# Altium PCB PCB1.PcbDoc
Units mil, origin at the board's own origin, x right, y up, seen from the top; angles counter-clockwise.
Board outline 3435 x 1880 mil, 2 copper layers (Top Layer, Bottom Layer); 58 components, 42 nets, 176 pads, 52 vias.
Unrouted connection lines stored in the file: 1.
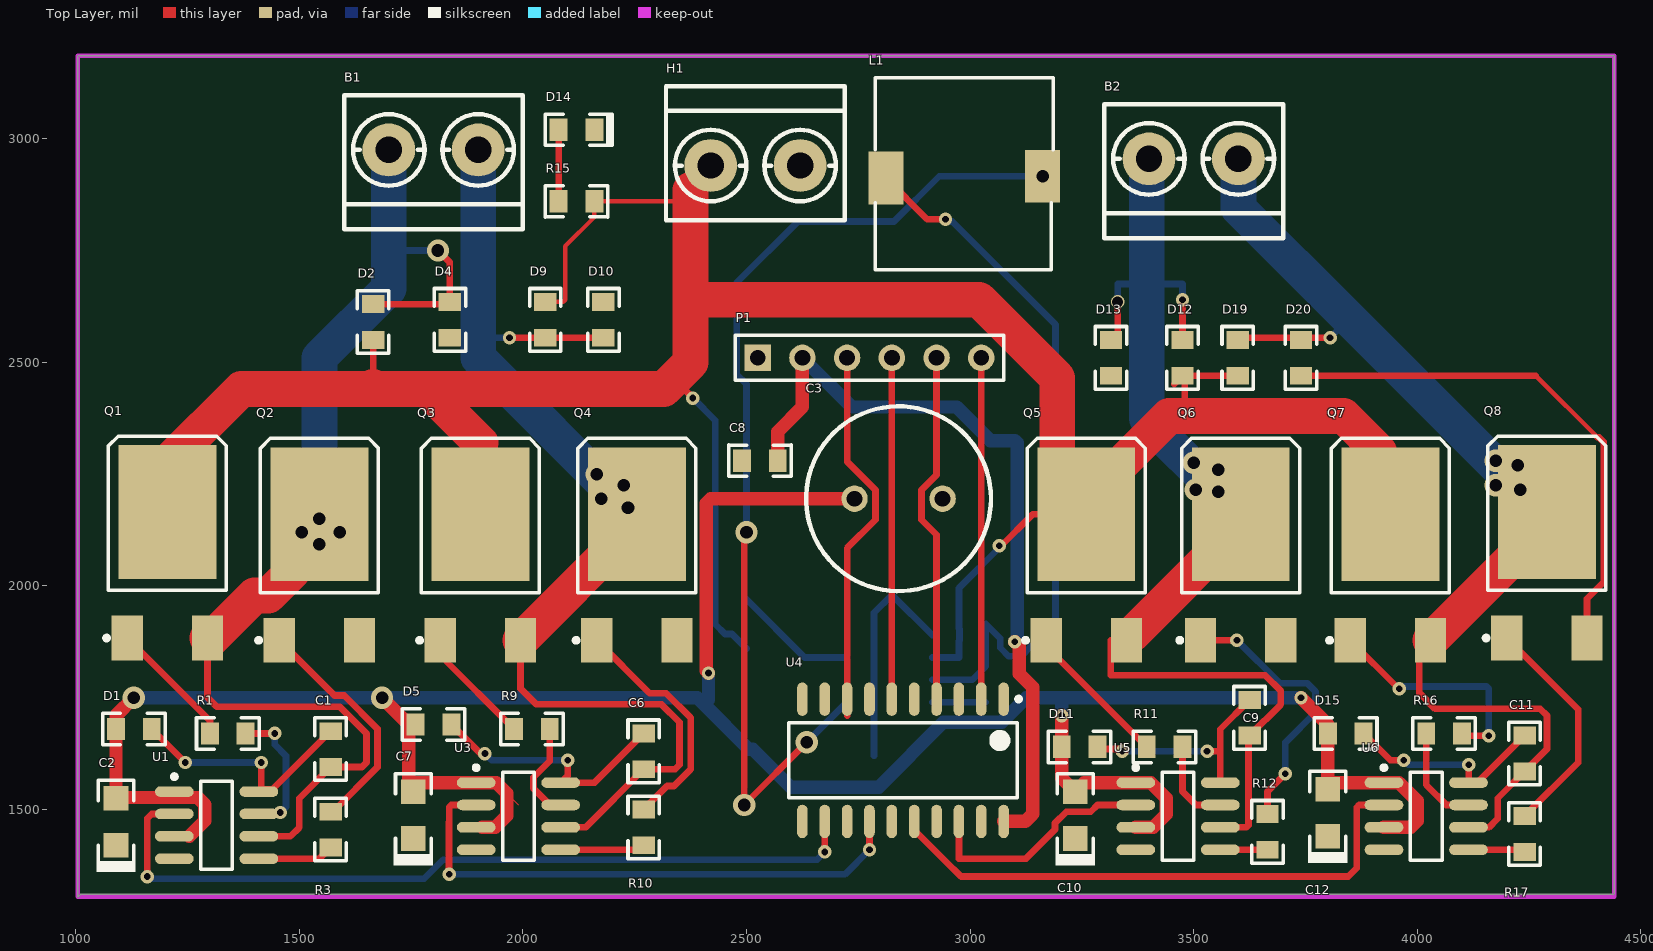
[diagram p0: Top Layer view]
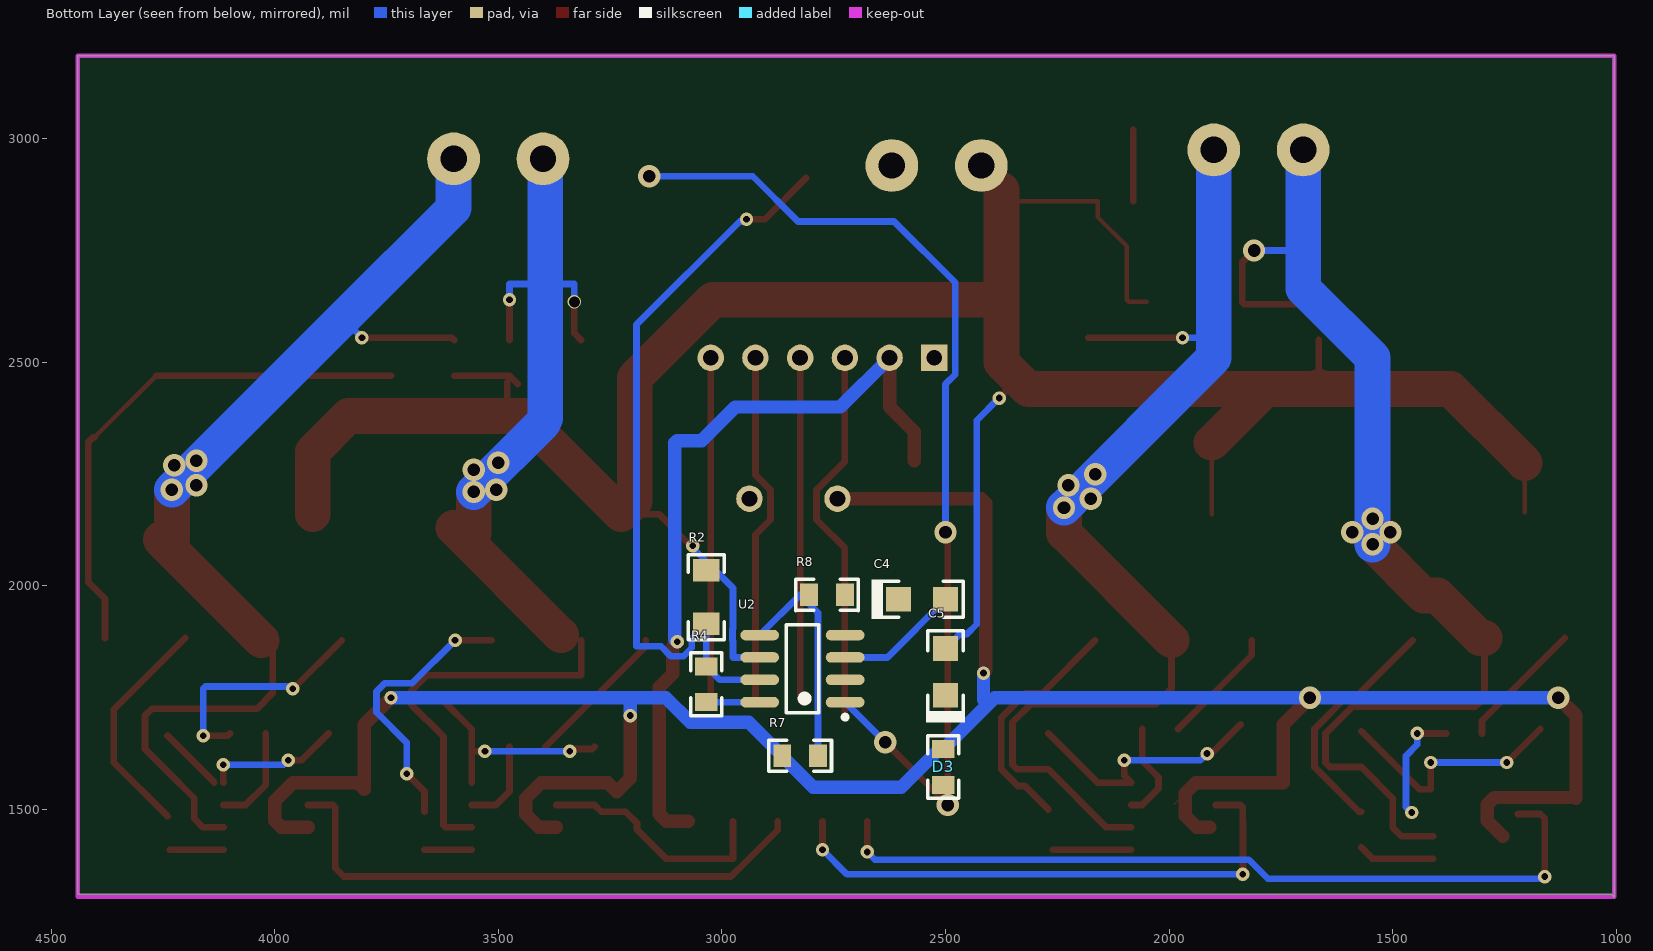
[diagram p1: Bottom Layer view, seen from below]

## Layer stack, top to bottom
Top Layer: signal copper 1.4
Dielectric: dielectric 12.6, FR-4, Dk 4.8
Bottom Layer: signal copper 1.4

## Board outline
1005,3185 1005,1305 1010,1310 4440,1310 4440,3185

## Design rules (kind name [scope] priority, off if disabled: settings)
Clearance [All] p1: gap=10
PolygonConnect [All] p1: connectstyle=Relief reliefconductorwidth=10 reliefentries=4 polygonreliefangle="90 Angle" airgapwidth=10
RoutingVias [All] p1: holewidth=28 width=50 viastyle="Through Hole" minholewidth=28 minwidth=50 maxholewidth=28 maxwidth=50
SolderMaskExpansion [All] p1: expansion=4
Width [All] p1: maxlimit=100 minlimit=1 preferedwidth=10 minimp=50.000000 maximp=50.000000 favimp=50.000000
28 further rules are at their usual default settings.

## Classes and differential pairs
component class Sheet1: C4 C5 D3 R2 R4 R7 R8 U2

## Components (designator, comment, footprint, x,y, rotation, side; value= is the part's Value field where it differs from the comment)
B1 "Motor" KF301-2P 1800,2975 r270 top
B2 "Motor" KF301-2P 3500,2955 r270 top
C1 "Cap" 0805(2012) 1570,1635 r270 top
C2 "Cap Pol1" SOD-323(0805) 1090,1470 r270 top
C3 "Cap Pol1" RB5-10.5 2840,2195 r0 top
C4 "Cap Pol1" SOD-323(0805) 2555,1970 r0 bottom
C5 "Cap Pol1" SOD-323(0805) 2500,1805 r270 bottom
C6 "Cap" 0805(2012) 2270,1630 r270 top
C7 "Cap Pol1" SOD-323(0805) 1755,1485 r270 top
C8 "Cap" 0805(2012) 2530,2280 r0 top
C9 "Cap" 0805(2012) 3625,1705 r270 top
C10 "Cap Pol1" SOD-323(0805) 3235,1485 r270 top
C11 "Cap" 0805(2012) 4240,1625 r270 top
C12 "Cap Pol1" SOD-323(0805) 3800,1490 r270 top
D1 "1N5819" 0805(2012) 1130,1680 r180 top
D2 "1N5819" 0805(2012) 1665,2590 r90 top
D3 "1N5819" 0805(2012) 2505,1595 r270 bottom
D4 "1N5819" 0805(2012) 1836.67,2595 r270 top
D5 "1N5819" 0805(2012) 1800,1690 r180 top
D9 "1N5819" 0805(2012) 2050,2595 r270 top
D10 "1N5819" 0805(2012) 2180,2595 r90 top
D11 "1N5819" 0805(2012) 3245,1640 r180 top
D12 "1N5819" 0805(2012) 3475,2510 r90 top
D13 "1N5819" 0805(2012) 3315,2510 r270 top
D14 "RED" 0805LED 2120,3020 r0 top
D15 "1N5819" 0805(2012) 3840,1670 r180 top
D19 "1N5819" 0805(2012) 3598.33,2510 r90 top
D20 "1N5819" 0805(2012) 3740,2510 r270 top
H1 "POWER IN" KF301-2P 2520,2940 r90 top
L1 "Inductor" 电感10*12 2985,2920 r0 top
P1 "PWM" HDR1X6 2525,2510 r0 top
Q1 "IR7843" LR7843 1205,2025 r270 top
Q2 "IR7843" LR7843 1545,2020 r270 top
Q3 "IR7843" LR7843 1905,2020 r270 top
Q4 "IR7843" LR7843 2255,2020 r270 top
Q5 "IR7843" LR7843 3260,2020 r270 top
Q6 "IR7843" LR7843 3605,2020 r270 top
Q7 "IR7843" LR7843 3940,2020 r270 top
Q8 "IR7843" LR7843 4290,2025 r270 top
R1 "Res2" 0805(2012) 1340,1670 r180 top
R2 "Res2" 1206(3216) 3035,1975 r90 bottom
R3 "Res2" 0805(2012) 1570,1455 r90 top
R4 "Res2" 0805(2012) 3035,1780 r90 bottom
R7 "Res2" 0805(2012) 2825,1620 r180 bottom
R8 "Res2" 0805(2012) 2765,1980 r0 bottom
R9 "Res2" 0805(2012) 2020,1680 r180 top
R10 "Res2" 0805(2012) 2270,1460 r90 top
R11 "Res2" 0805(2012) 3435,1640 r180 top
R12 "Res2" 0805(2012) 3665,1450 r90 top
R15 "Res2" 0805(2012) 2120,2860 r180 top
R16 "Res2" 0805(2012) 4060,1670 r0 top
R17 "Res2" 0805(2012) 4240,1445 r90 top
U1 "IR2104S" IR2104S 1315,1465 r0 top
U2 "MC34063" MC34063 2820,1815 r0 bottom
U3 "IR2104S" IR2104S 1990,1485 r0 top
U4 "74LS244" 74ls244DA 2850,1610 r270 top
U5 "IR2104S" IR2104S 3465,1485 r0 top
U6 "IR2104S" IR2104S 4020,1485 r0 top

## Footprints (in the part's own frame and the unit in brackets; to place one, negate y for a bottom-side part, rotate by r counter-clockwise, add the part's x,y. Pads: shape width x height; smd on the part's side, far side on the other; paste and mask are expansions set on the pad)
74ls244DA [mm] "SOP, 20-Leads, Body 12.80x5.50mm, Pitch 1.27mm, IPC Medium Density"
  oval 1.9x0.6 smd: 1(-3.475,5.715) 2(-3.475,4.445) 3(-3.475,3.175) 4(-3.475,1.905) 5(-3.475,0.635) 6(-3.475,-0.635) 7(-3.475,-1.905) 8(-3.475,-3.175) 9(-3.475,-4.445) 10(-3.475,-5.715) 11(3.475,-5.715) 12(3.475,-4.445) 13(3.475,-3.175) 14(3.475,-1.905) 15(3.475,-0.635) 16(3.475,0.635) 17(3.475,1.905) 18(3.475,3.175) 19(3.475,4.445) 20(3.475,5.715)
  silkscreen extent -3.6,-6.5 2.13,6.69, body extent -2.8,-6.5 2.8,6.5, height 2.2
0805(2012) [mil]
  rect 40x50 smd: 1(-40,0) 2(40,0)
  silkscreen extent -70,-35 70,35
0805LED [mil]
  rect 40x50 smd: 1(-40,0) 2(40,0)
  silkscreen extent -70,-35 80,35
1206(3216) [mil]
  rect 50x60 smd: 1(-60,0) 2(60,0)
  silkscreen extent -95,-40 95,40
HDR1X6 [mm] "Connector; Header; 6 Position"
  rect 1.5x1.5 hole 0.9: 1(0,0)
  round 1.5 hole 0.9: 2(2.54,0) 3(5.08,0) 4(7.62,0) 5(10.16,0) 6(12.7,0)
  silkscreen extent -1.27,-1.27 13.97,1.27
IR2104S [mm]
  oval 2.2x0.6 smd: 1(-2.4,1.905) 2(-2.4,0.635) 3(-2.4,-0.635) 4(-2.4,-1.905) 5(2.4,-1.905) 6(2.4,-0.635) 7(2.4,0.635) 8(2.4,1.905)
  silkscreen extent -2.52,-2.5 0.9,2.88, body extent -2,-2.5 2,2.5, height 1.55
KF301-2P [mm]
  round 3 hole 1.5: 1(0,-2.54) 2(0,2.54)
  silkscreen extent -3.1,-5.08 4.5,5.08
LR7843 [mm]
  rect 2.54x1.778 smd: 1(3.6,-2.28) 3(3.6,2.28)
  rect 7.6x5.55 smd: 2(-3.556,0)
  silkscreen extent -7.87,-3.58 3.72,3.35
MC34063 [mm] "SOIC, 8-Leads, Body 4.90x3.90mm, Pitch 1.27mm, IPC Medium Density"
  oval 2.2x0.6 smd: 1(-2.425,1.905) 2(-2.425,0.635) 3(-2.425,-0.635) 4(-2.425,-1.905) 5(2.425,-1.905) 6(2.425,-0.635) 7(2.425,0.635) 8(2.425,1.905)
  silkscreen extent -2.55,-2.5 0.93,2.88, body extent -2,-2.5 2,2.5, height 1.5
RB5-10.5 [mm] "Capacitor (Radial); 2 Leads"
  round 1.5 hole 0.9: 1(-2.5,0) 2(2.5,0)
  silkscreen extent -5.25,-5.25 5.25,5.25
SOD-323(0805) [mil]
  rect 55x55 smd: 1(-55,0) 2(50,0)
  silkscreen extent -95,-44 110,44
电感10*12 [mm]
  rect 2x3 smd: 1(-4.4,-0.2) 2(4.5,-0.1)
  silkscreen extent -5,-5.4 5.1,5.5

## Part data
B1 B2: library part "Motor Servo", "Servo Motor"
C1 C6 C8 C9 C11: "Capacitor"
C2 C3 C4 C5 C7 C10 C12: "Polarized Capacitor (Radial)"
D1 D2 D3 D4 D5 D9 D10 D11 D12 D13 D15 D19 D20: library part 1N4148, "Silicon Epitaxial Planar Diode for Various Detector, Modulator, Demodulator"
D14: library part LED2, "Typical RED, GREEN, YELLOW, AMBER GaAs LED"
P1: library part "Header 6", "Header, 6-Pin"
Q1 Q2 Q3 Q4 Q5 Q6 Q7 Q8: "N-Channel Power MOSFET"
R1 R2 R3 R4 R7 R8 R9 R10 R11 R12 R15 R16 R17: "Resistor"

## Via types
v1: diameter 30, hole 15, Top Layer to Bottom Layer, 28 vias
v2: diameter 50, hole 28, Top Layer to Bottom Layer, 23 vias
v3: diameter 30, hole 25, Top Layer to Bottom Layer, 1 vias

## Nets (pads, with @x,y where several pads share a name; then routed paths per layer and width w, separated by ;. In a path a pad name is that pad's centre, name@x,y a point inside that pad or via, vN(x,y) a via of type N, cw(c..) or ccw(c..) an arc to the next point about the centre after c; other vN are vias at no path point)
5V: C8.2 P1.2 U4.20 | length 1732.1
  Top Layer w30: C8.2 2570,2345 2625,2400 P1.2 ; U4.20 3123.19,1473.19 3140,1490 3140,1773.5 3110.24,1803.27 3110.24,1864.76 v1(3100,1875)
  Bottom Layer w30: P1.2 2735,2400 2970,2400 3045,2325 3100,2325 3105,2320 3105,1880 v1(3100,1875)
12V: C2.1 C3.1 C7.1 C10.1 C12.1 D1.2 D3.1 D5.2 D11.2 D15.2 R7.1 U1.1 U1.3 U3.1 U3.3 U5.1 U5.3 U6.1 U6.3 | length 5840.7
  Top Layer w0: 1963.82,1536.18 1990,1510
  Top Layer w30: v2(1130,1750) 1090,1710 D1.2 C2.1 1091.81,1526.81 1273.19,1526.81 1288.82,1511.18 1288.82,1474.75 U1.3@1254.07,1440 ; v2(1685,1750) 1745,1690 1745,1560 1940,1560 1963.82,1536.18 1963.82,1485.72 1938.1,1460 U3.3@1908.7,1460 ; v1(2415,1805) 2410,1810 2410,2185 2420,2195 C3.1 ; v1(3205,1710) D11.2 3205,1570 C10.1 3255,1560 U5.1 3404.07,1560 3438.82,1525.25 3438.82,1489.25 3409.57,1460 U5.3 ; v1(3740,1750) 3800,1690 D15.2 C12.1 3815,1560 U6.1 3959.07,1560 4000,1519.07 4000,1475 3985,1460 U6.3
  Bottom Layer w30: v2(1130,1750) v2(1685,1750) 2390,1750 2405,1735 ; v1(2415,1805) 2415,1745 2405,1735 ; v1(3205,1710) 3205,1750 ; v1(3740,1750) 3205,1750 ; 2405,1735 D3.1 2514.09,1635 2599.09,1550 2795.36,1550 2940.36,1695 3070.36,1695 3125.36,1750 3205,1750
GND: C2.2 C3.2 C4.2 C5.2 C7.2 C8.1 C10.2 C12.2 D4.2 D10.2 D13.2 D14.2 D20.2 H1.1 P1.1 Q2.3 Q4.3 Q6.3 Q8.3 R8.1 U1.4 U2.2 U2.4 U3.4 U4.1 U4.3 U4.5 U4.7 U4.9 U4.10 U4.11 U4.13 U4.15 U4.17 U4.19 U5.4 U6.4 | length 1192
  Top Layer w10: 4265,2470 4402.89,2332.11
  Top Layer w15: D20.2 4265,2470 ; Q8.3 4379.76,1971.16 4416.75,2008.14 4416.75,2321.86 4406.5,2332.11 4402.89,2332.11
"MOTOR IN1": U4.18 U5.2 | length 537
  Top Layer w15: U4.18 2975,1390 3125,1390 3190,1455 3190,1469.75 3215.25,1495 3269.75,1495 3284.75,1510 U5.2
"MOTOR IN2": U4.16 U6.2 | length 1258.1
  Top Layer w15: U4.16 2875,1454.64 2964.64,1365 2965,1365 2980,1350 3845.63,1350 3864.7,1369.07 3864.7,1472.44 3865,1472.73 3865,1505 3870,1510 U6.2
"MOTOR IN3": U3.2 U4.14 | length 1238.8
  Top Layer w15: v1(1835,1355) 1834.7,1355.3 1834.7,1472.14 1835,1472.44 1835,1505 1840,1510 U3.2 ; v1(2775,1410) U4.14
  Bottom Layer w15: v1(1835,1355) 2720,1355 v1(2775,1410)
"MOTOR IN4": U1.2 U4.12 | length 1807.9
  Top Layer w15: v1(1160,1350) 1159.7,1350.3 1159.7,1452.44 1160,1452.73 1160,1480 1170,1490 U1.2 ; v1(2675,1405) U4.12
  Bottom Layer w15: v1(1160,1350) 1160,1345 1779.04,1345 1821.54,1387.5 2657.5,1387.5 v1(2675,1405)
NetB1_1: B1.1 C1.2 D2.2 D4.1 Q1.3 Q2.2 U1.6 | length 2626.6
  Top Layer w15: Q1.3 1294.76,1750.24 1315,1730 1590,1730 1650,1670 1650,1605 1640,1595 C1.2 1500,1525 1500,1460 1480,1440 U1.6 ; D2.2 1831.67,2630 D4.1 1836.67,2723.33 v2(1810,2750)
  Top Layer w80: Q1.3 1304.53,1883.27 1399.53,1978.27 1430.43,1978.27 v2(1545,2092.83)
  Bottom Layer w15: 1700,2750 v2(1810,2750)
  Bottom Layer w80: v2(1545,2092.83) 1545,2510 1700,2665 1700,2750 B1.1
  other v2: 1505,2120 1590,2120 1545,2150
NetB1_2: B1.2 C6.2 D9.2 D10.1 Q3.3 Q4.2 U3.6 | length 2522.9
  Top Layer w15: v1(1970,2555) D9.2 D10.1 ; Q3.3 1994.76,1770.24 2030,1735 2310,1735 2350,1695 2350,1600 2340,1590 C6.2 2140,1460 U3.6
  Top Layer w80: Q3.3 2235,2118.5 v2(2235,2175)
  Bottom Layer w15: 1900,2555 v1(1970,2555)
  Bottom Layer w80: 1900,2550 1900,2510 v2(2235,2175) ; 1900,2555 B1.2
  other v2: 2175,2195 2225,2225 2165,2250
NetB2_1: B2.1 C9.2 D12.2 D13.1 Q5.3 Q6.2 U5.6 | length 2474.7
  Top Layer w15: Q5.3@3314.76,1878.27 3314.76,1800.24 3659.76,1800.24 3695,1765 3695,1735 C9.2 3622.5,1662.5 3622.5,1464.86 3617.64,1460 U5.6 ; D13.1 3330,2565 v3(3330,2635) ; D12.2 v1(3475,2640)
  Top Layer w80: Q5.3@3360,1890 Q6.2@3600.24,2130.24 ; Q6.2@3555,2118.5 v2(3555,2210)
  Bottom Layer w15: v3(3330,2635) 3330,2675 3395,2675 ; 3430,2675 3475,2675 v1(3475,2640)
  Bottom Layer w80: 3395,2375 3395,2675 B2.1@3395,2965 ; 3400,2365 v2(3555,2210)
  other v2: 3505,2215 3555,2260 3500,2275
NetB2_2: B2.2 C11.2 D19.2 D20.1 Q7.3 Q8.2 U6.6 | length 2473.3
  Top Layer w15: D19.2 3603.33,2555 v1(3805,2555) ; Q7.3@4004.76,1878.27 4004.76,1760.24 4040,1725 4275,1725 4290,1710 4290,1635 C11.2 4180,1525 4180,1480 4160,1460 U6.6
  Top Layer w80: Q7.3 Q8.2@4255,2103.5 ; Q8.2@4230,2103.5 v2(4230,2215)
  Bottom Layer w15: v1(3805,2555) 3847.5,2597.5
  Bottom Layer w80: B2.2 3600,2845 3847.5,2597.5 v2(4230,2215)
  other v2: 4175,2225 4225,2270 4175,2280
NetC1_1: C1.1 D1.1 U1.8 | length 544.2
  Top Layer w15: D1.1 v1(1245,1605) ; v1(1415,1605) 1415,1545.51 1440.51,1545.51 C1.1
  Bottom Layer w15: v1(1245,1605) v1(1415,1605)
NetC4_1: C4.1 U2.3 | length 278.4
  Bottom Layer w15: C4.1 2630,1840 U2.3
NetC6_1: C6.1 D5.1 U3.8 | length 580.6
  Top Layer w15: D5.1 1905,1625 v1(1915,1625) ; v1(2100,1610) 2100,1575.51 U3.8 2160,1560 C6.1
  Bottom Layer w15: v1(1915,1625) 1930,1610 v1(2100,1610)
NetC9_1: C9.1 D11.1 U5.8 | length 500.8
  Top Layer w15: D11.1 3290,1635 3345,1635 v1(3340,1630) ; v1(3530,1630) 3559.49,1630 ; U5.8 3559.49,1630 ; C9.1 3559.49,1679.49 3559.49,1630
  Bottom Layer w15: v1(3340,1630) v1(3530,1630)
NetC11_1: C11.1 D15.1 U6.8 | length 453
  Top Layer w15: D15.1 3940,1610 v1(3970,1610) ; U6.8 4115,1560 v1(4115,1600) ; U6.8@4135,1560 C11.1
  Bottom Layer w15: v1(3970,1610) 3980,1600 v1(4115,1600)
NetD3_2: D3.2 L1.2 U2.1 | length 2321.6
  Top Layer w15: v2(2495,1510) v2@2495,1510.47 ; v2(2500,2120) 2495,2115 v2@2495,1510.47 ; v2(2635,1650.47) v2@2495,1510.47
  Bottom Layer w15: v2(2495,1510) D3.2@2495,1545 ; v2(2500,2120) 2500,2451.2 2477.97,2473.22 2477.97,2677.97 2615,2815 2830,2815 2931.06,2916.06 v2(3162.17,2916.06) ; v2(2635,1650.47) U2.1
NetD14_1: D14.1 R15.2 | length 160
  Top Layer w15: R15.2 D14.1
NetL1_1: L1.1 R2.1 R4.2 U2.7 | length 1668.5
  Top Layer w15: L1.1 2903.9,2820 v1(2945,2820)
  Bottom Layer w15: U2.7 3005,1790 R4.2 R2.1 3067.5,1882.5 3067.5,1861.54 3086.54,1842.5 3113.46,1842.5 3135.96,1865 3190.87,1865 3190.87,2584.13 2960,2815 2950,2815 v1(2945,2820)
NetP1_3: P1.3 U4.8 | length 852.7
  Top Layer w15: U4.8@2725,1710 U4.8 2725,2084.37 2788.6,2147.97 2788.6,2214.48 2725,2278.08 P1.3
NetP1_4: P1.4 U4.6 | length 763.2
  Top Layer w15: U4.6 P1.4
NetP1_5: P1.5 U4.4 | length 791
  Top Layer w15: U4.4 2925,2114.37 2891.4,2147.97 2891.4,2214.48 2925,2248.08 P1.5
NetP1_6: P1.6 U4.2 | length 763.2
  Top Layer w15: U4.2 P1.6
NetQ1_1: Q1.1 R1.2 | length 289.8
  Top Layer w15: Q1.1 1300,1698.5 R1.2
NetQ2_1: Q2.1 R3.2 | length 533.7
  Top Layer w15: Q2.1 1578.5,1755 1600.36,1755 1675,1680.36 1675,1594.64 1575.36,1495 R3.2
NetQ3_1: Q3.1 R9.2 | length 266.5
  Top Layer w15: Q3.1 1815.24,1844.76 R9.2
NetQ4_1: Q4.1 R10.2 | length 539.2
  Top Layer w15: Q4.1 2283.5,1760 2320.36,1760 2375,1705.36 2375,1589.64 2337.86,1552.5 2322.5,1552.5 R10.2
NetQ5_1: Q5.1 R11.2 | length 331.4
  Top Layer w15: Q5.1 3170.24,1864.76 R11.2
NetQ6_1: Q6.1 R12.2 | length 617.8
  Top Layer w15: Q6.1 v1(3596.73,1878.27) ; R12.2@3665,1495 3665,1540 v1(3705,1580)
  Bottom Layer w15: v1(3596.73,1878.27) 3692.5,1782.5 3753.46,1782.5 3772.5,1763.46 3772.5,1717.5 3705,1650 v1(3705,1580)
NetQ7_1: Q7.1 R16.2 | length 525.8
  Top Layer w15: Q7.1 3958.5,1770 v1(3960,1770) ; R16.2 4105,1665 v1(4160,1665)
  Bottom Layer w15: v1(3960,1770) 3965,1775 4155,1775 4160,1770 v1(4160,1665)
NetQ8_1: Q8.1 R17.2 | length 514.2
  Top Layer w15: Q8.1 4360,1723.5 4360,1605 R17.2
NetR1_1: R1.1 U1.7 | length 261.9
  Top Layer w15: R1.1 v1(1445,1670) ; v1@1454.31,1490 v1(1457.5,1493.19)
  Bottom Layer w15: v1(1445,1670) 1445,1645 1470,1620 1470,1505.69 v1(1457.5,1493.19)
NetR3_1: R3.1 U1.5 | length 170.9
  Top Layer w15: U1.5 1545,1390 R3.1
NetR4_1: R4.1 U2.8 | length 119.5
  Bottom Layer w15: U2.8 R4.1
NetR7_2: R7.2 R8.2 U2.5 | length 504
  Bottom Layer w15: R7.2 2785.34,1620.34 2785.34,1939.86 2825.47,1980 U2.5
NetR9_1: R9.1 U3.7 | length 224.3
  Top Layer w15: R9.1 2060,1608.46 2023.68,1572.14 2023.68,1546.75 2060.43,1510 U3.7
NetR10_1: R10.1 U3.5 | length 175.5
  Top Layer w15: U3.5 R10.1@2260,1410
NetR11_1: R11.1 U5.7 | length 196.9
  Top Layer w15: R11.1 3475,1540 3505,1510 U5.7
NetR12_1: R12.1 U5.5 | length 105.5
  Top Layer w15: U5.5 R12.1
NetR16_1: R16.1 U6.7 | length 228.1
  Top Layer w15: R16.1 4020,1555 4065,1510 U6.7
NetR17_1: R17.1 U6.5 | length 120.5
  Top Layer w15: U6.5 R17.1@4235,1410
VBAT: C5.1 D2.1 D9.1 D12.1 D19.1 H1.2 Q1.2 Q3.2 Q5.2 Q7.2 R2.2 R15.1 U2.6 | length 6370
  Top Layer w10: Q1.2 Q1.2@1205,2275 ; Q3.2 1905,2320 ; D9.1 2090,2635 2095,2640 2095,2760 2160,2825 R15.1 2340,2860 H1.2
  Top Layer w15: 1665,2445 D2.1 ; 2315,2440 2360,2440 v1(2380,2420) ; v1@3067.5,2087.5 3140,2160 Q5.2@3225,2160 ; D12.1@3456.67,2451.67 D12.1 D19.1 ; 3480,2395 D12.1@3480,2455
  Top Layer w80: Q1.2@1205,2275 1370,2440 1660,2440 1665,2445 ; 1665,2440 1785,2440 ; 1905,2320 1785,2440 ; 2375,2885 2375,2640 ; 3445,2380 3225,2160 3195,2190 3195,2465 3020,2640 2375,2640 ; 3456.67,2380 3835,2380 3915,2300 Q7.2@3915,2160 ; 1785,2440 2315,2440 2375,2500 2375,2640
  Bottom Layer w15: v1(2380,2420) 2430,2370 2430,1914.29 2451.79,1892.5 2467.5,1892.5 C5.1 ; U2.6 2975,1840 2975,1876.58 2976.28,1877.86 2976.28,1903.42 2975,1904.7 2975,1995 v1@3067.5,2087.5
  other v1: 3065,2090

## Keep-outs
Keep-Out Layer:
  lines w10: 1005,1305 4440,1305 4440,3185 1005,3185 1005,1305